# Altium PCB 主板-加霍尔.PcbDoc (part 3 of 4)
Units mm, origin at the board's own origin, x right, y up, seen from the top; angles counter-clockwise.
Board outline 97.69 x 103.45 mm, 2 copper layers (Top Layer, Bottom Layer); 80 components, 81 nets, 260 pads, 281 vias.
Unrouted connection lines stored in the file: 12.
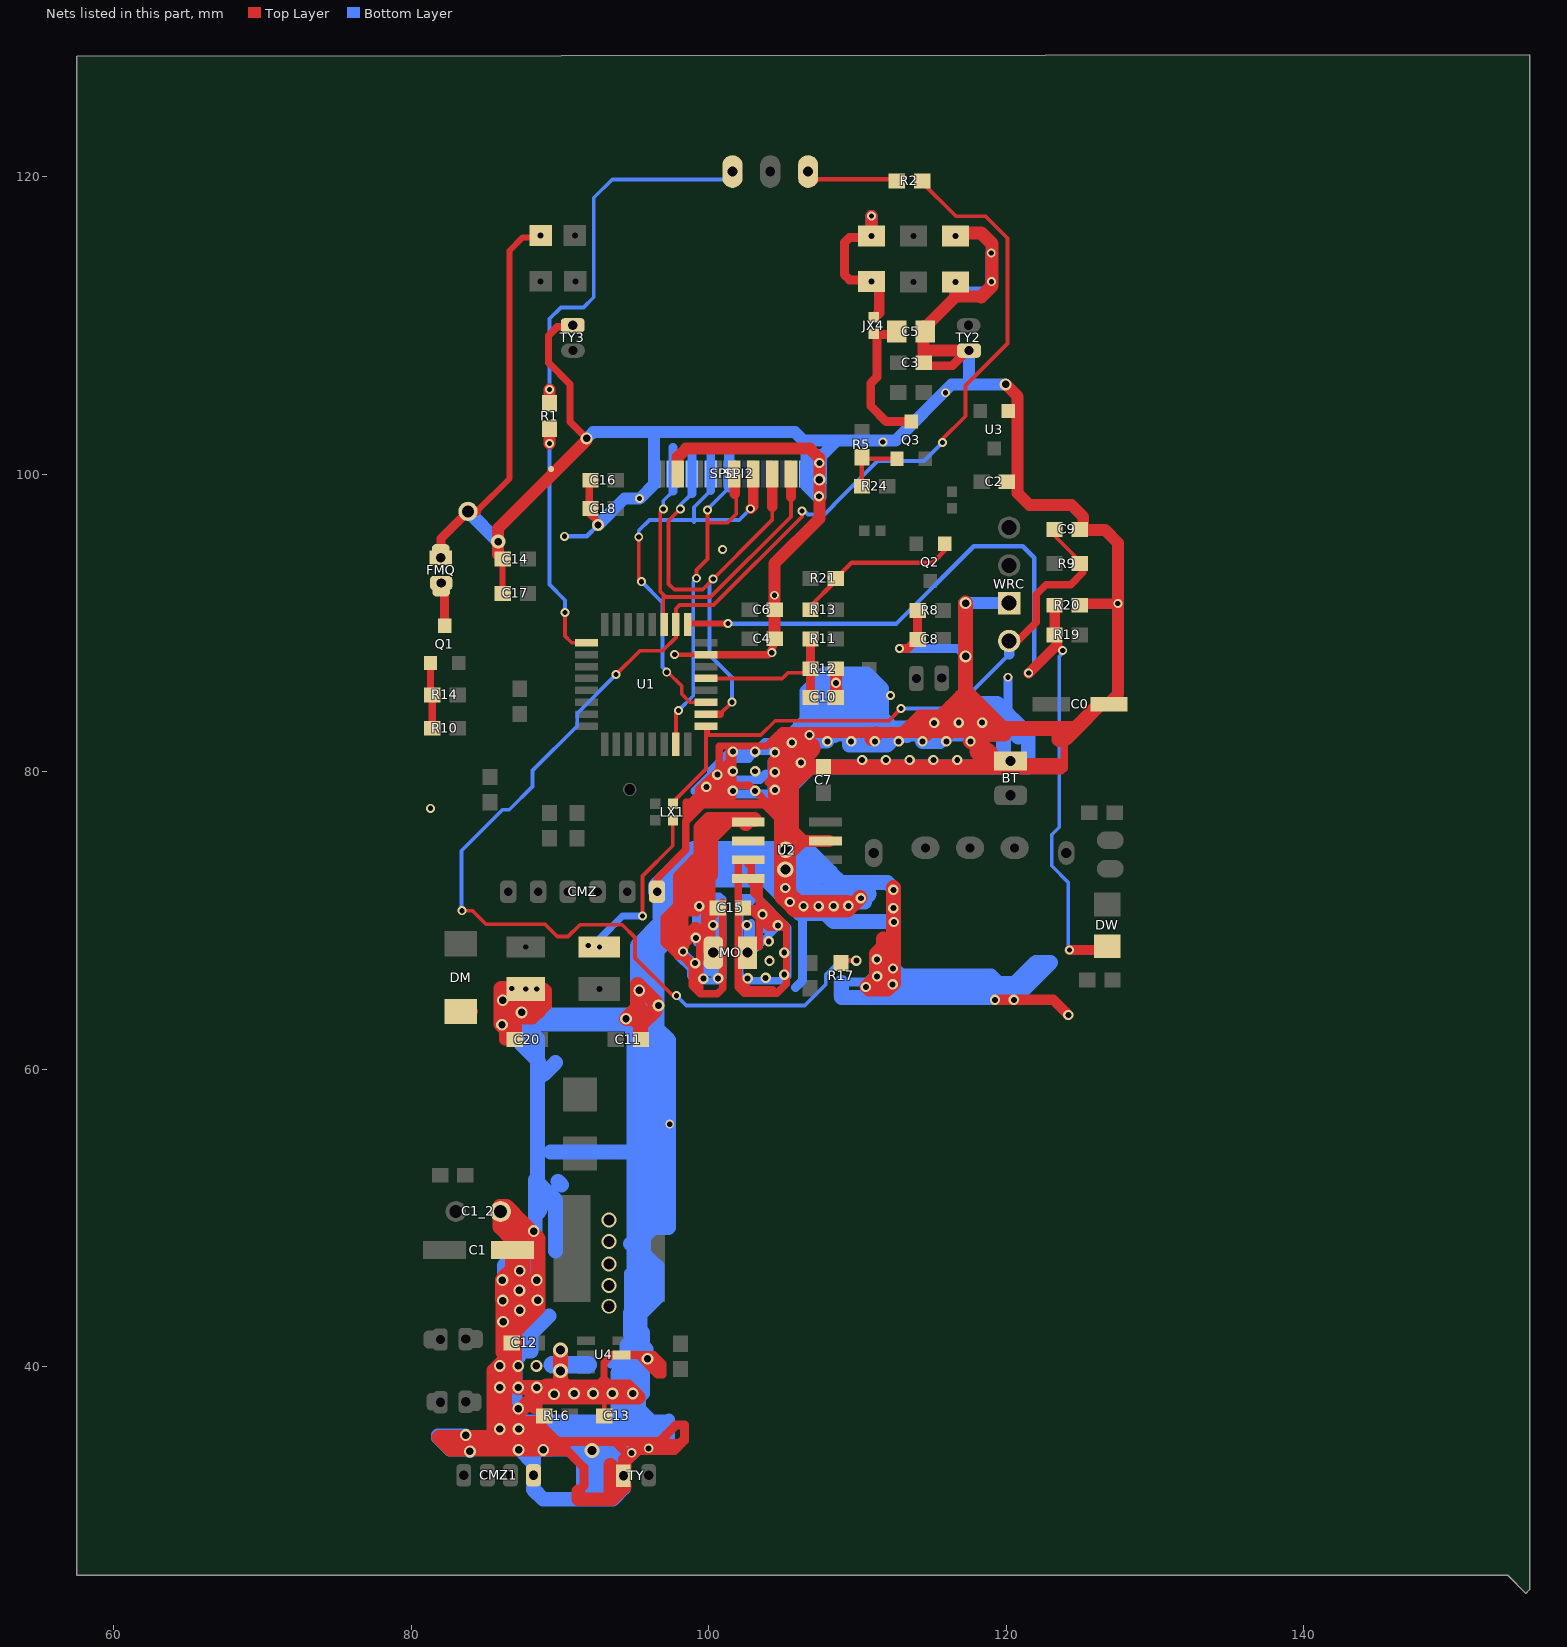
[diagram p3: the nets of this part, all layers, seen from the top]

## Via types
v1: diameter 0.6, hole 0.35, Top Layer to Bottom Layer, 105 vias
v2: diameter 0.7, hole 0.4, Top Layer to Bottom Layer, 104 vias
v3: diameter 0.8, hole 0.5, Top Layer to Bottom Layer, tented both sides, 30 vias
v4: diameter 0.8, hole 0.5, Top Layer to Bottom Layer, 15 vias
v5: diameter 1, hole 0.6, Top Layer to Bottom Layer, tented both sides, 5 vias
v6: diameter 1, hole 0.75, Top Layer to Bottom Layer, tented both sides, 5 vias
v7: diameter 3.4, hole 2.9, Top Layer to Bottom Layer, 4 vias
v8: diameter 0.65, hole 0.4, Top Layer to Bottom Layer, tented both sides, 2 vias
v9: diameter 0.8, hole 0.35, Top Layer to Bottom Layer, 2 vias
v10: diameter 0.7, hole 0.35, Top Layer to Bottom Layer, 2 vias
v11: diameter 1.1, hole 0.68, Top Layer to Bottom Layer, 2 vias
v12: diameter 0.62, hole 0.4, Top Layer to Bottom Layer, 1 vias
v13: diameter 0.95, hole 0.5, Top Layer to Bottom Layer, 1 vias
v14: diameter 0.9, hole 0.5, Top Layer to Bottom Layer, tented both sides, 1 vias
v15: diameter 0.7, hole 0.4, Top Layer to Bottom Layer, tented bottom, 1 vias
v16: diameter 0.8, hole 0.5, Top Layer to Bottom Layer, tented bottom, 1 vias

## Nets (pads, with @x,y where several pads share a name; then routed paths per layer and width w, separated by ;. In a path a pad name is that pad's centre, name@x,y a point inside that pad or via, vN(x,y) a via of type N, cw(c..) or ccw(c..) an arc to the next point about the centre after c; other vN are vias at no path point) (continued)
GND: BT.2 C0.2 C1.1 C1_2.1 C2.1 C3.1 C4.2 C5.1 C6.1 C7.1 C8.1 C9.1 C10.2 C11.2 C12.2 C13.2 C14.2 C16.1 C17.2 C18.1 C20.1 CMZ1.7 CMZ.2 DM.1 FMQ.1 pad.0@81.991,94.717 pad.0@87.7,65.4 pad.0@88.7,116.053 pad.0@89.408,100.355 pad.0@96.33,100.032 pad.0@116.6,112.932 pad.0@116.6,116.032 pad.4@83.82,97.511 R8.2 R12.1 R16.2 R20.1 SPI1.7 SPI2.8 TY2.2 TY3.2 TY.2 U1.7 U2.3 U3.1 U4.2 WRC.2 | length 1392.5
  Top Layer w0.254: C0.2@126.695,84.557 126.84,84.549 C0.2@126.913,84.546
  Top Layer w0.3: C13.2@92.989,36.8 92.989,37.854 ; v1(97.714,87.884) U1.7@99.818,87.884
  Top Layer w0.4: pad.4@84.406,97.511 86.604,99.708 86.604,115.034 87.507,115.937 pad.0@88.583,115.937 ; C17.2@86.131,91.75 C14.2@86.131,94.319
  Top Layer w0.495: U1.7@99.825,87.877 104.006,87.877 C4.2@104.523,88.724 ; C4.2@104.419,88.951 C4.2@104.65,88.951 ; C0.2@126.913,84.546 126.924,84.328 C0.2@126.924,84.633
  Top Layer w0.5: 90.221,38.811 90.221,39.227 90.51,38.938 ; TY3.2@90.855,109.919 89.826,109.919 89.23,109.323 89.23,107.518 90.678,106.07 90.678,103.53 v4(91.796,102.413) ; v4@91.992,38.412 92.005,38.424 92.227,38.647 92.368,38.647 92.371,38.65 92.964,39.243 ; C16.1@92.05,99.6 91.973,99.523 91.973,97.379 92.558,96.795 v4(92.558,96.596) ; 92.95,38.643 92.964,38.643 92.964,38.648 92.964,38.65 92.964,39.243 ; v4@93.428,37.954 93.675,38.202 94.123,38.649 93.523,38.649 ; 93.523,38.65 93.523,38.684 92.964,39.243 ; U4.2@94.539,40.767 95.25,40.767 96.545,39.472 96.901,39.472 96.901,40.208 96.305,40.804 93.496,40.804 92.964,40.272 92.964,39.243 ; CMZ.2@96.53,71.944 96.53,72.829 98.462,74.762 98.462,76.641 98.476,76.655 ; 99.113,78.285 99.125,78.272 99.162,78.236 99.456,77.942 99.496,77.902 ; 99.136,78.308 98.476,77.648 ; 99.343,78.816 99.339,78.812 99.339,78.359 ; 99.466,78.816 101.397,80.747 ; 99.949,78.435 99.822,78.308 ; v2(100.584,79.807) 100.711,79.934 100.711,81.737 103.886,81.737 104.47,82.321 ; v2@101.397,81.356 101.397,80.747 ; 104.013,79.299 104.242,79.527 ; 104.369,80.366 104.391,80.366 ; 104.572,82.423 104.496,82.347 ; 104.648,72.252 104.648,76.86 104.47,77.038 ; v2(105.588,81.966) 105.379,82.123 105.13,82.372 104.826,82.677 ; 106.248,82.779 112.981,82.779 ; 116.459,82.779 117.831,82.779 ; 118.059,82.525 116.205,82.525 ; 118.059,82.537 116.218,82.537 ; 120.498,80.061 123.723,80.061 123.901,80.239 123.901,81.813 123.546,82.169 ; 124.003,82.245 124.003,82.525 124.003,82.753 124.117,82.639 ; 124.231,82.525 124.117,82.639 ; C0.2@126.924,84.633 C0.2@126.913,84.622 ; 98.476,76.655 99.609,77.788 ; 98.476,76.655 98.476,77.241 ; 98.476,77.241 99.023,77.788 99.609,77.788 ; 98.476,77.241 98.476,77.622 ; 98.476,77.622 98.802,77.949 98.929,77.949 ; 98.476,77.622 98.476,77.648 ; 98.476,77.648 98.476,77.949 98.929,77.949 ; 98.929,77.949 99.339,78.359 ; 98.929,77.949 101.194,80.213 100.736,80.213 99.339,78.816 v2@99.67,78.816 ; 99.339,78.359 99.339,78.486 v2@99.67,78.816 ; 99.496,77.902 99.609,77.788 ; 99.496,77.902 99.416,77.902 99.822,78.308 ; 99.496,77.902 103.607,77.902 103.72,77.788 ; 99.609,77.788 103.72,77.788 ; v2@99.67,78.816 v2(99.847,78.994) 100.892,80.038 101.117,79.812 101.117,79.731 ; v2@99.67,78.816 99.67,78.308 99.822,78.308 ; v2@99.67,78.816 100.203,78.816 ; 99.822,78.308 101.575,78.308 101.629,78.363 v2(101.629,78.715) 101.629,79.096 ; 100.203,78.816 100.635,79.248 ; 100.203,78.816 100.508,78.816 100.635,78.943 ; 100.203,78.816 100,78.613 100.965,78.613 ; 100.635,78.943 100.787,79.096 101.117,79.096 ; 100.635,78.943 100.965,78.613 ; 100.635,78.943 100.635,79.248 ; 100.635,79.248 101.117,79.731 ; 100.965,78.613 101.117,78.461 101.346,78.461 101.346,79.096 ; 100.965,78.613 101.117,78.765 101.117,79.096 ; 101.117,79.096 101.117,79.731 ; 101.117,79.096 101.346,79.096 ; 101.117,79.731 v2@101.346,79.959 ; 101.346,79.096 v2@101.346,79.959 ; 101.346,79.096 101.629,79.096 ; v2@101.346,79.959 101.397,80.01 101.397,80.747 ; 101.397,80.747 101.629,80.979 v2(101.629,80.038) 101.629,79.096 ; 101.629,79.096 102.743,79.096 v2(103.124,78.715) 104.05,77.788 ; 103.72,77.788 104.242,77.267 ; 103.72,77.788 104.05,77.788 ; 104.05,77.788 104.242,77.597 ; 104.05,77.788 104.204,77.788 104.242,77.826 ; 104.242,77.267 104.242,77.597 ; 104.242,77.267 104.47,77.038 ; 104.242,77.597 104.242,77.826 ; 104.242,77.826 104.242,79.527 ; 104.242,79.527 104.242,80.518 ; 104.242,79.527 104.391,79.527 104.391,80.366 ; 104.242,80.518 104.242,80.772 104.391,80.921 ; 104.242,80.518 104.391,80.667 ; 104.391,80.366 104.47,80.366 ; 104.391,80.366 104.391,80.667 ; 104.391,80.667 104.47,80.747 ; 104.391,80.667 104.391,80.921 ; 104.391,80.921 104.391,81.632 104.47,81.712 ; 104.391,80.921 v2@104.47,81.001 ; 104.47,77.038 104.47,80.366 ; 104.47,80.366 104.572,80.366 v2@106.731,82.525 ; 104.47,80.366 104.47,80.747 ; 104.47,80.747 106.248,82.525 v2@106.731,82.525 ; 104.47,80.747 v2@104.47,81.001 ; v2@104.47,81.001 104.47,81.712 ; v2@104.47,81.001 104.496,81.026 104.496,81.28 105.994,82.779 105.537,82.779 ; 104.47,81.712 105.537,82.779 ; 104.47,81.712 104.47,82.321 ; 104.47,82.321 104.496,82.347 ; 104.496,82.347 104.826,82.677 ; 104.826,82.677 104.928,82.779 105.537,82.779 ; v2@106.731,82.525 111.239,82.525 112.727,82.525 ; v2@106.731,82.525 106.743,82.537 111.252,82.537 112.74,82.537 ; 112.727,82.525 116.027,82.525 116.205,82.525 ; 112.727,82.525 112.74,82.537 ; 112.74,82.537 114.592,82.537 116.04,82.537 116.218,82.537 ; 112.74,82.537 112.981,82.779 ; 112.981,82.779 114.15,83.947 115.875,83.947 116.279,84.351 116.838,84.351 116.894,84.351 116.261,83.718 116.205,83.718 115.646,83.718 114.884,83.718 ; 112.981,82.779 113.538,82.779 ; 113.538,82.779 113.944,82.779 ; 113.538,82.779 114.198,83.439 ; 113.944,82.779 114.884,83.718 ; 113.944,82.779 114.706,82.779 114.833,82.779 115.265,82.779 116.218,82.779 116.218,82.715 116.218,82.537 ; 114.198,83.439 114.478,83.718 ; 114.198,83.439 113.919,83.439 114.198,83.718 114.478,83.718 ; 114.198,83.439 114.351,83.439 114.63,83.718 ; 114.478,83.718 114.63,83.871 114.783,83.871 114.63,83.718 ; 114.478,83.718 114.63,83.718 ; 114.63,83.718 114.884,83.718 ; 116.205,82.525 116.218,82.537 ; 123.685,80.48 123.485,80.68 120.853,80.68 121.218,80.315 123.52,80.315 123.685,80.48 ; 123.685,80.48 123.698,80.467 123.698,80.493 123.685,80.48 ; 124.117,82.639 124.384,82.906 126.024,84.546 126.303,84.546 C0.2@126.837,84.546 ; C0.2@126.837,84.546 126.84,84.549 C0.2@126.913,84.622 ; C0.2@126.837,84.546 C0.2@126.913,84.546 C0.2@126.913,84.622
  Top Layer w0.6: FMQ.1@81.991,94.398 81.991,95.682 pad.4@83.82,97.511 pad.4@84.406,97.511 ; 86.076,36.198 86.076,37.036 86.081,37.032 86.276,36.836 86.689,36.423 ; 86.69,36.423 87.148,36.423 87.546,36.423 87.774,36.195 89.15,34.819 ; v3@86.982,36.055 v3@87.516,36.055 ; 87.376,36.195 v3@87.516,36.055 ; 88.033,35.369 87.566,35.369 ; pad.0@88.583,115.937 pad.0@88.7,116.053 ; R16.2@88.67,36.957 88.67,36.195 88.67,35.841 89.764,34.747 ; 88.951,35.865 89.764,35.052 89.764,34.747 ; 89.852,35.052 90.037,34.868 ; 91.237,31.623 91.618,32.004 91.618,33.223 90.551,34.29 89.484,34.29 89.306,34.468 89.205,34.569 89.103,34.671 89.172,34.796 ; 94.259,34.417 93.696,34.98 ; v8(95.961,34.519) 96.114,34.366 97.688,34.366 98.374,35.052 98.374,36.093 97.815,36.093 96.787,35.065 97.003,34.849 ; 96.698,34.544 96.749,34.595 97.003,34.849 ; 96.723,34.849 97.003,34.849 ; 97.134,34.98 93.696,34.98 ; 98.171,34.849 98.171,34.976 ; 98.374,35.179 98.171,34.976 ; v1(112.827,88.29) 113.386,88.29 114.05,88.955 R8.2@114.05,90.881 ; C3.1@114.45,107.3 116.382,107.3 117.413,108.331 TY2.2@117.501,108.419 ; 87.49,35.446 87.427,35.509 87.109,35.827 v3@87.49,35.827 ; 87.49,35.446 87.49,35.573 v3@87.49,35.827 ; 87.49,35.446 87.566,35.369 ; 87.49,35.446 87.49,35.369 87.566,35.369 ; v3@87.49,35.827 87.744,35.827 ; v3@87.516,36.055 87.744,35.827 ; 87.566,35.369 88.117,34.819 ; 87.744,35.827 87.933,35.827 88.117,35.642 88.117,34.819 ; 88.117,34.819 89.15,34.819 ; 89.15,34.819 89.172,34.796 ; 89.15,34.819 89.184,34.819 89.172,34.796 ; 89.172,34.796 89.298,34.671 89.399,34.569 89.475,34.493 89.764,34.493 89.764,34.595 89.764,34.671 89.764,34.747 ; 89.764,34.747 89.84,34.671 ; 89.84,34.671 90.149,34.362 90.149,34.755 ; 89.84,34.671 90.037,34.868 ; 90.037,34.868 90.149,34.755 ; 90.037,34.868 90.149,34.98 90.149,34.755 ; 90.149,34.755 90.424,34.48 90.424,34.722 90.165,34.98 93.696,34.98 ; 97.003,34.849 98.044,34.849 98.171,34.976
  Top Layer w0.7: DM.1@83.34,63.885 DM.1@84.125,63.885 ; v2(119.253,64.668) v2(120.523,64.668) 123.165,64.668 v2(124.181,63.652) ; R20.1@125.15,91.308 v1@127.432,91.308
  Top Layer w0.8: C14.2@86.131,94.319 85.847,94.603 85.847,96.363 v4@91.796,102.311 ; 86.311,62 v3@86.311,62.763 ; 86.766,63.017 86.766,63.419 87.015,63.419 ; C20.1@86.958,62 86.766,62.191 87.015,62.44 87.015,63.419 ; v3(87.427,63.83) v3@87.524,63.83 ; pad.0@87.6,65.406 87.602,65.406 87.617,65.406 87.617,65.415 87.617,65.431 pad.0@87.617,65.457 ; 87.681,38.608 87.716,38.643 88.91,38.643 89.078,38.811 89.924,38.811 89.762,38.649 89.756,38.644 ; 88.316,37.854 92.989,37.854 ; 88.348,37.954 89.037,38.644 89.756,38.644 ; v10(88.443,65.405) 88.958,65.405 89.06,65.303 89.06,64.305 88.585,63.83 ; pad.0@88.519,65.1 88.519,64.825 v3@87.524,63.83 ; 88.621,63.83 88.585,63.83 ; 89.306,38.643 89.611,38.643 89.756,38.644 ; 90.957,38.659 90.957,38.649 90.957,38.647 90.957,38.645 89.764,38.644 89.756,38.644 ; 92.227,38.647 92.368,38.647 92.533,38.648 92.674,38.648 92.964,38.648 92.989,38.648 93.076,38.648 93.522,38.649 ; v4(94.894,38.202) 94.894,38.32 94.894,38.329 95.269,37.954 95.261,37.954 ; SPI1.7@97.917,100.032 97.917,101.16 98.484,101.727 106.807,101.727 107.442,101.092 v2(107.442,100.762) v4(107.442,99.644) 107.442,97.028 104.419,94.005 C4.2@104.419,88.951 ; 105.156,71.704 105.156,71.933 v2(105.156,72.187) v11@105.156,73.33 ; 105.156,76.86 v11@105.156,73.575 ; v11@105.181,72.923 105.181,73.304 v11@105.156,73.33 ; 105.588,76.124 106.35,75.362 105.318,74.33 105.318,73.575 v11@105.156,73.575 ; 106.07,75.362 U2.3@108.077,75.362 ; C10.2@108.55,85 R12.1@108.55,86.932 ; C3.1@114.45,107.5 C5.1@114.45,109.976 ; C5.1@114.45,109.776 116.6,111.926 pad.0@116.6,112.932 ; 114.816,108.331 117.413,108.331 TY2.2@117.475,108.331 ; 116.756,111.946 118.321,111.946 ; v4(119.964,106.045) 120.766,105.243 120.766,98.74 121.564,97.942 124.384,97.942 125.184,97.142 125.184,96.266 126.644,96.266 127.533,95.377 127.533,85.242 C0.2@126.924,84.633 ; 87.015,63.419 88.174,63.419 88.585,63.83 ; v3@87.524,63.83 88.585,63.83 ; v11@105.156,73.33 105.14,73.429 105.131,73.483 105.115,73.575 105.131,73.575 v11@105.156,73.575 ; v11@105.156,73.33 v11(105.156,73.431) v11@105.156,73.575 ; 118.165,111.946 ccw(c118.165,112.467) 118.533,112.099 ; 118.165,111.946 ccw(c118.165,112.467) 118.533,112.099 ; 118.165,111.946 ccw(c118.165,112.467) 118.533,112.099
  Top Layer w0.9: 91.237,31.623 91.237,31.09 93.523,31.09 TY.2@94.364,31.931 ; TY.2@94.123,32.674 93.37,33.426 93.37,31.242 93.472,31.14 TY.2@94.364,32.032 ; TY.2@94.364,32.674 94.364,33.658 ; v8(95.961,34.519) 95.225,34.519 ; 96.749,34.595 95.301,34.595 95.225,34.519 ; pad.0@116.865,116.23 118.313,116.23 119.05,115.494 119.05,112.674 118.321,111.946 ; 94.364,33.658 94.364,33.76 ; 94.364,33.658 94.361,33.655 94.361,33.757 94.364,33.76 ; 94.364,33.658 v8@94.818,34.112 ; 94.364,33.76 v8(94.818,34.214) ; v8@94.818,34.112 95.225,34.519 ; v8@94.818,34.112 v8(94.818,34.214) ; v8(94.818,34.214) 95.123,34.519 95.225,34.519
  Top Layer w1: 85.649,39.751 v3(85.954,40.056) ; 85.877,37.694 85.877,35.916 85.573,35.611 ; 86.081,37.49 86.081,37.032 86.081,35.966 85.573,35.458 ; v3(86.131,45.822) 86.157,42.977 86.157,40.996 ; v3@86.157,42.697 v3@86.411,42.951 ; v3@86.208,43.282 86.208,45.974 86.8,46.566 C1.1@86.8,47.84 C1.1@86.8,48.26 ; C12.2@86.276,41.437 86.276,37.778 ; 86.284,40.97 v3@86.284,43.078 ; C12.2@86.309,41.529 86.309,40.03 86.88,39.505 86.944,39.446 86.944,38.799 87.136,38.608 v3(87.198,38.608) 87.681,38.608 v3(88.443,38.608) 88.875,38.608 ; v3@86.311,62.763 86.03,63.044 86.03,65.43 v10(86.766,65.43) ; 86.36,35.992 86.397,36.029 ; 86.385,44.958 v3@87.374,43.97 ; 86.411,49.657 87.342,48.726 ; 86.431,63.754 86.766,63.419 86.766,65.406 87.6,65.406 pad.0@87.6,65.432 ; 86.614,44.45 86.614,45.339 ; 86.689,36.423 86.919,36.652 ; 86.766,63.017 86.958,62.826 C20.1@86.958,62 ; 86.8,48.557 85.95,49.407 85.95,50.775 86.411,50.775 87.503,49.682 ; 86.868,41.046 85.573,39.751 85.573,38.481 ; 86.944,39.497 86.944,43.663 86.294,44.313 87.237,44.313 ; v3@86.982,36.055 86.276,36.762 86.276,36.836 86.276,37.295 ; v3(87.427,63.83) pad.0@87.427,65.329 ; pad.0@87.612,65.41 87.617,65.406 87.661,65.361 pad.0@87.72,65.302 ; 87.744,35.827 87.49,35.573 87.427,35.509 87.165,35.247 85.581,35.247 ; v3@88.036,48.889 88.036,48.641 C1.1@87.503,48.108 ; v3@88.062,45.745 87.68,45.364 87.68,45.229 ; 88.316,37.311 88.316,37.854 ; 88.67,36.195 87.774,36.195 87.376,36.195 87.148,36.423 86.919,36.652 ; 88.91,38.643 88.875,38.608 ; 89,38.649 89.611,38.649 89.762,38.649 89.764,38.649 90.957,38.649 92.227,38.65 92.371,38.65 92.535,38.65 ; v3@89.103,34.671 89.298,34.671 89.764,34.671 89.84,34.671 89.764,34.595 89.738,34.569 89.399,34.569 v3@89.205,34.569 ; 89.306,34.468 85.581,34.468 ; 89.764,38.647 90.957,38.647 ; 90.043,39.1 v5(90.043,39.729) v5(90.043,41.123) ; v4@91.992,38.412 91.757,38.647 90.957,38.647 ; 92.989,38.71 92.989,38.65 ; C11.2@95.428,62.222 95.428,62.967 95.225,63.17 ; 95.431,64.033 95.225,64.033 ; v16(95.885,40.538) 96.444,39.98 96.444,40.081 v16@95.961,40.564 ; v3@96.393,64.165 96.393,63.957 ; 105.588,76.124 105.588,79.121 106.782,80.315 BT.2@121.218,80.315 ; v2@109.271,70.968 109.601,70.968 v2@110.185,71.552 ; v2@110.634,65.549 111.269,66.184 111.269,67.759 ; v2@110.803,65.38 111.989,65.38 v2@112.42,65.811 ; v2@110.96,82.245 111.239,82.525 111.252,82.537 ; 110.973,65.811 v2@112.116,65.811 ; 111.176,65.38 111.506,65.71 v2(112.37,65.71) ; 111.633,67.869 111.379,67.869 112.42,68.91 ; 111.735,66.167 111.735,66.192 ; 111.735,68.758 111.735,66.531 ; v2@112.166,65.761 v2@112.116,65.811 ; v2@112.344,66.531 111.735,66.531 ; v2@112.42,72.212 v2(112.42,72.06) v2(112.42,70.841) v2@112.42,65.811 ; 114.592,82.537 114.833,82.779 ; 114.706,82.779 115.646,83.718 116.279,84.351 116.98,85.052 117.17,84.861 117.17,84.684 ; 115.265,82.779 116.205,83.718 116.838,84.351 117.17,84.684 ; 116.027,82.525 116.04,82.537 116.218,82.715 v2(116.815,83.312) ; v4(117.272,91.338) 117.272,85.42 119.786,82.906 123.546,82.906 ; v2(117.602,82.042) 118.059,82.499 ; 118.681,82.537 119.875,82.537 ; 123.546,82.169 123.546,82.906 ; 124.003,82.245 124.663,82.906 ; 124.003,82.525 124.231,82.525 ; C0.2@126.303,84.546 124.663,82.906 ; 85.479,34.468 82.652,34.468 81.864,35.255 85.217,35.255 85.573,35.611 ; 85.479,34.468 85.479,35.247 85.547,35.247 ; 85.479,34.468 85.547,34.468 ; 85.547,34.468 85.581,34.468 ; 85.547,34.468 85.547,35.247 ; 85.547,35.247 85.573,35.273 85.573,35.408 ; 85.547,35.247 85.581,35.247 ; 85.547,35.247 85.547,35.433 ; 85.547,35.433 85.573,35.408 ; 85.547,35.433 85.573,35.458 ; 85.573,35.408 85.581,35.4 85.581,35.247 ; 85.573,35.408 85.573,35.458 ; 85.573,35.458 85.573,35.611 ; 85.573,35.611 85.573,38.481 ; 85.573,38.481 86.276,37.778 ; 85.581,34.468 85.581,35.247 ; 86.276,37.295 86.276,37.778 ; 86.276,37.295 86.919,36.652 ; 86.919,36.652 88.875,38.608 ; 87.237,44.313 87.493,44.313 87.503,44.323 ; 87.237,44.313 87.237,42.66 88.536,43.959 v3@88.536,44.374 ; 87.237,44.313 v3@87.237,44.946 ; v3@87.237,44.946 v3@87.503,45.212 ; v3@87.237,44.946 87.02,44.729 87.02,47.625 C1.1@87.494,48.099 ; C1.1@87.494,48.099 C1.1@87.503,48.09 ; C1.1@87.494,48.099 C1.1@87.503,48.108 ; 87.503,44.323 v3@87.503,45.212 ; 87.503,44.323 87.68,44.5 87.68,45.212 ; v3@87.503,45.212 87.68,45.212 ; v3@87.503,45.212 v3@87.6,45.309 ; C1.1@87.503,48.09 87.503,45.406 v3@87.6,45.309 ; C1.1@87.503,48.09 C1.1@87.503,48.108 ; C1.1@87.503,48.108 87.503,49.682 ; 87.503,49.682 88.036,49.149 88.036,49.124 88.536,48.624 88.536,45.034 ; pad.0@87.6,65.432 87.617,65.431 87.701,65.43 87.845,65.427 pad.0@87.723,65.305 ; pad.0@87.6,65.432 87.617,65.415 87.665,65.366 pad.0@87.723,65.305 ; pad.0@87.6,65.432 87.602,65.406 87.603,65.393 87.606,65.345 87.617,65.199 pad.0@87.72,65.302 ; v3@87.6,45.309 87.68,45.229 ; 87.68,45.212 87.697,45.212 ; 87.68,45.212 87.68,45.229 ; 87.68,45.229 87.697,45.212 ; 87.697,45.212 v3@88.536,44.374 ; 87.697,45.212 88.358,45.212 88.536,45.034 ; pad.0@87.72,65.302 87.96,65.062 pad.0@87.723,65.305 ; pad.0@87.72,65.302 pad.0@87.723,65.305 ; v3@88.536,44.374 88.536,45.034 ; 90.957,38.647 91.406,38.647 ; 90.957,38.647 91.406,38.647 ; 91.406,38.647 92.227,38.647 ; 91.406,38.647 92.227,38.647 ; 92.227,38.647 92.532,38.647 92.535,38.65 ; 92.535,38.65 92.676,38.65 ; 92.535,38.65 92.676,38.65 ; 92.676,38.65 92.964,38.65 ; 92.676,38.65 92.674,38.648 v4(92.227,38.202) 92.475,37.954 92.989,37.954 ; 92.676,38.65 92.964,38.65 ; 92.964,38.65 92.989,38.65 ; 92.964,38.65 92.989,38.65 ; 92.989,37.954 92.989,38.648 92.989,38.65 ; 92.989,37.954 93.428,37.954 95.261,37.954 94.894,38.32 94.564,38.65 ; 92.989,38.65 93.074,38.65 ; 92.989,38.65 93.523,38.65 ; 93.074,38.65 93.076,38.648 v4(93.523,38.202) 93.675,38.202 v4(94.894,38.202) 94.446,38.65 ; 93.074,38.65 93.523,38.65 ; 93.523,38.65 94.124,38.65 ; 93.523,38.65 94.124,38.65 ; 94.124,38.65 94.362,38.65 ; 94.124,38.65 94.362,38.65 ; 94.362,38.65 94.446,38.65 ; 94.362,38.65 94.564,38.65 ; 94.446,38.65 94.564,38.65 ; 95.225,63.17 94.996,63.398 94.463,63.398 95.098,64.033 95.225,64.033 ; 95.225,63.17 95.225,64.033 ; 95.225,63.17 95.606,63.17 96.393,63.957 ; 95.225,64.033 95.225,65.71 96.393,64.541 96.393,63.957 ; 105.308,79.198 ccw(c105.308,80.058) 105.917,79.45 ; 105.308,79.198 ccw(c105.308,80.058) 105.917,79.45 ; 105.308,79.198 ccw(c105.308,80.058) 105.917,79.45 ; 105.321,79.2 ccw(c105.061,80.171) 105.932,79.668 ; 105.321,79.2 ccw(c105.061,80.171) 105.932,79.668 ; 105.321,79.2 ccw(c105.061,80.171) 105.932,79.668 ; 105.321,79.2 ccw(c105.061,80.171) 105.932,79.668 ; 105.321,79.2 ccw(c105.061,80.171) 105.932,79.668 ; 105.321,79.2 ccw(c105.061,80.171) 105.932,79.668 ; 105.344,79.283 cw(c104.755,78.694) 105.588,78.694 ; 105.344,79.283 cw(c104.755,78.694) 105.588,78.694 ; 105.344,79.283 cw(c104.755,78.694) 105.588,78.694 ; 111.735,66.192 v2@112.116,65.811 ; 111.735,66.192 111.735,66.531 ; v2@112.116,65.811 v2@112.42,65.811 ; 117.17,83.795 117.17,82.829 118.643,82.829 118.643,83.223 118.529,83.337 117.78,83.337 117.78,84.404 117.17,83.795 ; 117.17,83.795 117.17,84.684 ; 123.546,82.906 124.384,82.906 124.663,82.906
  Top Layer w1.5: 105.156,71.704 105.893,70.968 v2(106.375,70.968) v2(107.391,70.968) v2(108.407,70.968) v2@109.271,70.968 ; v2@105.156,71.933 105.131,71.958 105.131,73.483 105.131,73.575 105.131,79.959 106.782,81.61 ; 118.285,81.407 118.407,81.407 118.75,81.153
  Bottom Layer w0.3: v1(90.297,95.834) 91.796,95.834 v4(92.558,96.596)
  Bottom Layer w0.4: SPI2.8@106.375,100.223 106.375,102.273
  Bottom Layer w0.6: 94.615,41.395 94.615,46.304 ; 99.085,78.715 99.365,78.994 ; 99.411,78.715 99.614,78.511 100.203,78.511 ; v2(99.847,78.994) v2@99.72,78.994 ; 103.835,79.858 103.447,79.469 100.922,79.469 v2(100.584,79.807) 100.584,80.14 101.215,80.772 101.215,80.899 102.667,80.899 v2(103.124,81.356) 103.193,81.425 104.234,81.425 104.445,81.636 104.115,81.966 103.782,81.966 103.33,81.513 101.63,81.513 100.18,80.063 100.18,79.809 99.365,78.994 ; 105.232,78.511 100.203,78.511 ; 105.842,65.507 106.319,65.984 106.319,70.485 106.319,70.912 v2(106.375,70.968) ; 108.864,64.745 108.864,65.837 ; 109.347,65.862 110.642,65.862 111.1,66.319 v2@111.1,67.335 ; v1(112.827,88.29) 116.738,88.29 v4(117.272,87.757) ; 117.907,83.287 117.717,83.476 117.717,84.162 118.008,83.871 120.117,83.871 ; v1(120.117,86.36) 120.117,83.871 ; 120.244,83.312 120.117,83.439 120.117,83.871 ; 99.365,78.994 v2@99.72,78.994 ; v2@99.72,78.994 100.203,78.511
  Bottom Layer w0.8: 86.055,39 86.552,39 86.614,38.938 ; 86.081,65.303 86.131,65.354 pad.0@87.621,65.354 ; 86.203,63.936 87.071,63.068 ; 86.614,63.833 87.602,63.833 v3@87.617,63.817 ; 87.6,62.944 90.38,62.944 cw(c90.38,65.29) 88.511,63.87 ; pad.0@88.287,65.194 88.049,65.432 87.6,65.432 89.278,63.754 95.326,63.754 ; 88.889,64.143 cw(c88.521,63.774) 89.041,63.752 ; 89.484,63.5 89.84,63.144 ; v4(91.796,102.413) 92.227,102.845 96.33,102.845 ; v4(92.558,96.596) 94.336,98.374 v1(95.352,98.374) 96.33,99.353 pad.0@96.33,100.032 96.33,102.845 ; 94.488,34.519 94.818,34.519 95.214,34.519 v8(95.961,34.519) 96.952,34.519 97.18,34.747 97.333,34.9 97.333,36.449 97.18,36.297 ; 94.64,42.164 94.64,43.637 ; 95.555,63.805 96.418,63.805 ; 95.656,66.345 95.656,66.712 ; v4@107.417,99.593 v2@107.417,100.533 ; v2@107.442,101.092 108.623,102.273 106.375,102.273 ; 107.442,101.321 106.832,101.321 106.832,101.816 106.375,102.273 ; v2@108.153,71.145 108.179,71.12 v2@108.382,70.917 ; 108.648,102.273 112.56,102.273 116.332,106.045 v4(119.964,106.045) ; pad.0@116.6,112.932 116.6,111.924 116.919,112.243 118.593,112.243 118.999,112.649 v1(118.999,114.884) ; v4@117.17,91.345 WRC.2@120.2,91.345 ; 117.501,106.045 TY2.2@117.501,108.319 ; 95.152,63.805 ccw(c95.152,64.476) 95.656,64.033 ; 95.152,63.805 ccw(c95.152,64.476) 95.656,64.033 ; 95.152,63.805 ccw(c95.152,64.476) 95.656,64.033 ; 96.33,102.845 105.804,102.845 106.375,102.273
  Bottom Layer w0.9: 82.423,35.204 82.423,34.595 ; pad.4@83.82,97.511 v13(85.852,95.479) ; v3(83.947,34.315) v3@83.845,34.417 ; 86.652,36.386 87.046,36.779 87.046,39.656 ; 92.903,31.09 92.954,31.14 93.505,31.691 ; 93.484,40.322 93.841,40.322 ; 93.841,39.599 93.841,37.009 94.742,36.108 ; 94.092,36.108 94.714,35.486 96.314,35.486 96.441,35.486 97.18,34.747 95.442,34.747 ; 94.264,31.831 94.264,32.182 94.264,32.207 TY.2@94.264,32.674 94.264,33.569 95.214,34.519 95.442,34.747 ; 95.112,35.077 95.239,34.95 ; 95.174,34.849 95.148,34.849 94.488,34.849 94.59,34.95 95.239,34.95 ; 81.788,35.408 v3(83.664,35.408) ; 81.788,35.408 82.334,35.408 82.334,34.684 ; 81.788,35.408 81.788,35.23 82.334,34.684 ; 82.334,34.684 82.423,34.595 ; 82.423,34.595 82.601,34.417 83.483,34.417 ; 83.483,34.417 v3@83.845,34.417 ; 83.483,34.417 83.664,34.598 ; 83.664,34.598 v3@83.694,34.568 ; 83.664,34.598 v3@83.694,34.568 ; v3(83.664,35.408) 82.347,35.408 83.156,34.598 83.664,35.106 v3(83.664,35.408) ; v3(83.664,35.408) 83.694,35.378 v3@83.694,34.568 ; v3@83.694,34.568 v3@83.845,34.417 ; 95.239,34.95 95.244,34.945 95.442,34.747
  Bottom Layer w1: v3@86.055,40.005 86.055,39 86.055,36.297 ; 86.081,65.303 86.081,63.017 88.57,60.528 88.57,60.427 ; 86.157,63.754 v3@86.157,64.523 ; v3@86.258,42.933 86.258,46.812 86.665,47.219 ; 86.385,42.672 86.385,42.52 v3@87.354,43.488 ; 86.411,40.259 v3@86.411,44.221 ; 86.487,42.723 86.643,42.879 ; pad.0@86.521,65.432 87.6,65.432 v10(86.766,65.43) pad.0@86.664,65.429 ; 86.589,43.637 87.401,44.45 ; 86.614,36.386 86.614,38.938 86.614,39.167 86.843,38.938 ; 86.792,43.314 86.792,43.466 ; 86.868,47.498 87.884,48.514 87.884,44.558 86.792,43.466 ; 86.919,35.458 93.472,35.458 93.294,35.636 93.426,35.636 92.954,36.108 ; 87.02,41.275 87.859,41.275 ; 87.147,42.792 87.916,43.561 ; 87.224,40.665 86.868,41.021 86.893,41.046 ; v3@87.396,44.071 86.792,43.466 ; 87.579,62.964 88.494,62.05 88.494,51.41 cw(c87.943,50.859) 88.549,50.37 ; v3@88.697,34.595 v3@88.773,34.519 ; v3@88.824,34.519 v3@88.773,34.519 ; v3@88.874,34.468 v3@88.926,34.468 ; 88.9,59.639 89.713,60.452 ; v3@89.002,34.544 v3@88.926,34.468 ; 89.129,34.9 88.697,34.9 ; 89.256,43.409 88.062,42.215 ; 89.332,34.468 v3@89.129,34.468 ; 89.357,54.432 96.728,54.432 ; 89.672,36.108 92.954,36.108 ; 89.704,47.777 89.704,51.215 88.341,52.578 88.341,43.536 88.062,43.256 ; 89.865,52.476 90.117,52.225 ; 91.694,33.376 91.981,33.376 ; 91.999,32.029 92.151,32.182 92.522,32.182 ; 92.001,32.125 91.663,31.787 ; 92.954,31.14 93.574,31.14 94.264,31.831 93.523,31.09 88.875,31.09 88.22,31.744 CMZ1.7@88.22,32.7 88.22,33.522 ; 93.223,32.7 92.804,32.7 93.323,32.182 ; 93.505,31.691 93.601,31.787 ; 93.604,32.085 93.604,32.182 ; 93.955,35.636 93.955,34.976 93.98,34.95 94.386,34.95 94.488,34.849 ; TY.2@94.264,32.182 TY.2@94.239,32.182 ; TY.2@94.264,32.207 TY.2@94.239,32.182 ; 94.488,35.707 94.488,34.849 ; 94.615,37.186 94.656,37.144 ; 94.656,36.432 94.656,37.144 ; 94.742,36.108 94.092,36.108 ; 94.755,48.273 95.326,48.844 ; 94.793,42.164 95.555,41.402 ; 94.92,41.758 94.92,39.345 95.225,39.649 ; 94.971,48.844 95.326,48.844 ; 94.971,62.407 94.971,54.576 ; 95.098,49.835 95.758,50.495 ; 95.148,44.653 95.225,44.729 ; 95.148,46.228 95.148,46.076 ; 95.225,37.391 95.225,39.649 ; 95.225,44.12 95.225,44.729 ; 95.244,34.945 95.148,34.849 94.818,34.519 94.488,34.188 ; 95.326,48.057 95.326,48.844 ; 95.326,50.927 95.326,51.155 ; 95.326,62.763 95.326,54.576 94.971,54.576 ; 95.327,61.713 cw(c97.266,61.713) 95.895,63.084 ; 95.327,62.763 96.52,62.763 ; 95.542,48.628 95.898,48.984 ; 95.631,47.498 95.631,48.412 ; 95.682,47.523 96.469,46.736 ; 95.733,48.819 95.898,48.984 ; 95.758,45.339 95.758,47.32 ; 95.824,63.084 cw(c94.758,62.017) 96.266,62.017 ; 95.838,63.074 cw(c95.5,62.386) 96.266,62.386 ; 95.858,63.069 cw(c95.831,62.381) 96.52,62.381 ; 95.898,44.552 95.898,45.402 95.225,44.729 ; 95.898,49.416 95.898,48.984 ; 95.904,63.142 ccw(c96.52,63.454) 96.52,62.763 ; 95.961,49.708 96.19,49.708 ; 96.284,35.456 96.314,35.486 94.656,37.144 ; 96.441,35.486 96.7,35.486 97.231,36.017 ; 96.52,46.761 96.52,44.653 95.377,43.51 95.377,42.469 95.555,42.291 95.555,41.402 ; 96.52,68.123 96.52,62.763 ; CMZ.2@96.53,71.944 97.866,71.944 ; 96.977,49.708 96.622,49.708 95.898,48.984 ; 97.18,36.297 96.139,36.297 95.301,37.135 95.301,37.973 95.54,38.212 95.54,39.882 95.555,39.896 95.555,39.98 ; 103.745,72.836 106.096,70.485 106.319,70.485 107.823,70.485 108.382,69.926 112.42,69.926 v2(112.42,70.841) 112.42,72.161 112.014,72.568 108.864,72.568 108.179,73.254 ; v11(105.181,74.752) 106.705,74.752 108.179,73.279 108.179,73.254 ; 106.136,72.507 106.451,72.822 106.959,73.33 ; SPI2.8@106.649,100.666 106.649,99.294 v2(107.417,98.527) ; v2@106.782,82.524 v2@106.87,82.436 ; v2@107.417,98.501 v2(107.417,98.527) ; v4@107.417,99.593 v2(107.417,98.527) ; v4@107.442,99.492 v4(107.442,99.644) v2(107.442,100.762) v2@107.442,101.092 ; v2@108.179,70.915 v2@108.179,70.917 ; 108.179,71.806 108.179,72.517 ; 108.471,82.436 107.975,82.436 ; 108.941,65.837 108.941,64.821 113.005,64.821 ; 109.195,71.501 108.636,72.06 108.179,72.517 ; v2@109.449,71.247 110.49,71.247 v2(110.236,71.501) ; 109.466,86.335 109.466,82.525 ; 109.728,86.233 110.363,85.598 110.363,82.781 110.583,82.561 ; 111.049,85.649 111.049,83.026 110.583,82.561 ; v2(111.303,67.386) 111.303,67.031 111.912,66.421 ; 111.811,67.361 v2(112.395,66.777) 112.903,66.269 ; 112.039,66.421 111.912,66.421 ; v2@112.166,66.523 112.42,66.269 ; v2@112.395,65.938 111.912,66.421 ; 112.598,65.227 113.005,64.821 ; 113.342,82.448 113.342,82.525 ; v2(114.375,82.042) 115.545,82.042 116.027,82.525 ; BT.2@120.297,80.674 BT.2@120.297,80.315 ; 120.371,65.507 120.802,65.938 ; 120.828,82.321 119.99,83.16 119.99,83.287 ; 120.853,65.735 119.939,64.821 ; 86.055,36.297 92.765,36.297 92.954,36.108 ; 86.055,36.297 86.055,35.687 86.754,34.989 ; 86.055,36.297 86.754,35.598 ; 86.754,34.989 v3@87.224,34.519 ; 86.754,34.989 86.754,35.598 ; 86.754,35.598 87.452,34.9 ; 86.893,41.046 88.062,41.046 88.062,42.215 ; 86.893,41.046 86.893,42.088 88.062,43.256 ; v3@87.224,34.519 88.22,33.522 ; v3@87.224,34.519 87.833,34.519 ; 87.452,34.9 87.833,34.519 ; 87.452,34.9 88.697,34.9 ; 87.833,34.519 88.316,34.519 ; 88.062,42.215 88.062,43.256 ; 88.22,33.522 88.22,34.423 88.316,34.519 ; 88.316,34.519 v3@88.773,34.519 ; 88.697,34.9 v3@89.128,34.468 ; v3@88.773,34.519 v3(88.875,34.417) v3@88.926,34.468 ; v3@88.926,34.468 v3@89.128,34.468 ; v3@89.128,34.468 91.109,34.468 ; 91.109,34.468 94.107,34.468 94.488,34.849 ; 91.109,34.468 91.948,33.629 91.567,33.248 91.567,31.691 ; 91.567,31.691 92.403,31.691 92.499,31.787 ; 91.567,31.691 91.663,31.787 ; 91.663,31.787 92.499,31.787 ; 91.981,33.376 92.522,33.376 ; 91.981,33.376 92.522,32.835 ; 92.499,31.787 93.601,31.787 ; 92.499,31.787 92.522,31.81 92.522,32.182 ; 92.522,32.182 93.323,32.182 ; 92.522,32.182 92.522,32.835 ; 92.522,32.835 92.522,33.376 ; 92.522,32.835 93.063,33.376 ; 92.522,33.376 93.063,33.376 ; 92.522,33.376 92.522,33.64 91.948,34.214 93.853,34.214 94.183,33.884 ; 92.954,36.108 93.523,36.678 94.092,36.108 ; 92.954,36.108 94.092,36.108 ; 93.063,33.376 93.604,33.376 ; 93.323,32.182 93.659,31.845 93.601,31.787 ; 93.323,32.182 93.604,32.182 ; 93.601,31.787 93.844,31.787 TY.2@94.239,32.182 ; 93.604,32.182 93.604,33.376 ; 93.604,32.182 TY.2@94.239,32.182 ; 93.604,33.376 93.675,33.376 94.183,33.884 ; 94.183,33.884 94.488,34.188 ; 94.488,34.188 94.488,34.519 94.488,34.849 ; 94.971,54.576 94.971,46.253 95.148,46.076 ; 95.148,46.076 95.225,46.152 95.225,44.729 ; 95.225,39.649 95.555,39.98 ; 95.555,39.98 95.555,41.402 ; 95.555,39.98 95.783,40.208 95.783,41.173 95.555,41.402 ; 95.758,50.495 95.327,50.926 95.327,54.576 96.266,54.576 ; 95.758,50.495 96.368,49.886 ; 95.86,63.069 cw(c95.86,62.151) 96.509,62.8 ccw(c95.86,62.151) 95.86,63.069 ; 95.86,63.069 cw(c95.86,62.212) 96.465,62.818 ccw(c95.86,62.212) 95.86,63.069 ; 96.266,54.576 96.266,50.063 96.368,50.165 96.368,49.886 ; 96.266,54.576 96.266,62.509 96.901,61.874 96.901,50.419 96.368,49.886 ; 96.368,49.886 95.834,49.352 97.307,49.352 97.307,61.976 96.52,62.763 ; 96.674,35.846 ccw(c96.502,36.017) 96.745,36.017 ; 96.674,35.846 ccw(c96.502,36.017) 96.745,36.017 ; 96.674,35.846 ccw(c96.502,36.017) 96.745,36.017 ; 104.496,80.696 104.496,78.991 105.08,79.575 105.08,81.94 106.604,83.464 106.604,85.395 107.798,86.589 110.617,86.589 111.633,85.573 111.633,83.668 112.092,83.208 ; 104.496,80.696 106.235,82.436 ; 104.496,80.696 104.47,80.67 104.47,78.965 104.696,78.74 105.258,78.74 106.832,80.315 118.828,80.315 ; 105.308,79.198 ccw(c105.308,80.181) 106.004,79.486 ; 105.308,79.198 ccw(c105.308,80.181) 106.004,79.486 ; 105.308,79.198 ccw(c105.308,80.181) 106.004,79.486 ; 105.321,79.2 ccw(c105.05,80.211) 105.957,79.688 ; 105.321,79.2 ccw(c105.05,80.211) 105.957,79.688 ; 105.321,79.2 ccw(c105.05,80.211) 105.957,79.688 ; 105.321,79.2 ccw(c105.05,80.211) 105.957,79.688 ; 105.321,79.2 ccw(c105.05,80.211) 105.957,79.688 ; 105.321,79.2 ccw(c105.05,80.211) 105.957,79.688 ; 106.235,82.436 v2@106.87,82.436 ; 106.235,82.436 106.219,82.436 106.121,82.533 106.121,83.083 v2@106.68,82.525 ; 106.235,82.436 106.324,82.525 v2@106.68,82.525 ; v2@106.68,82.525 v2@106.782,82.525 ; v2@106.782,82.525 v2@106.931,82.525 ; v2@106.782,82.525 106.782,84.303 ; 106.782,84.303 107.15,84.671 ; 106.782,84.303 106.782,84.379 107.112,84.709 107.15,84.671 ; v2@106.87,82.436 107.975,82.436 ; v2@106.87,82.436 107.249,82.057 107.927,82.057 107.975,82.105 107.975,82.436 ; v2@106.931,82.525 107.975,82.525 ; v2@106.931,82.525 107.442,83.036 107.442,84.379 107.15,84.671 ; 107.15,84.671 107.975,85.496 ; 107.975,82.436 107.975,82.525 ; 107.975,82.525 108.56,82.525 ; 107.975,82.525 107.975,85.496 ; 107.975,85.496 107.975,86.081 ; 107.975,85.496 v2@108.56,86.081 ; 107.975,86.081 107.95,86.081 106.883,85.014 106.883,85.496 107.975,86.589 107.975,86.081 ; 107.975,86.081 v2@108.56,86.081 ; 108.179,72.517 108.179,73.254 ; 108.56,82.525 v2@108.56,86.081 ; 108.56,82.525 109.466,82.525 ; 109.466,82.525 109.466,81.788 111.992,81.788 112.513,82.309 112.308,82.309 112.092,82.525 ; 109.466,82.525 110.583,82.525 ; 110.583,82.525 110.583,82.488 110.62,82.525 ; 110.583,82.525 110.583,82.561 ; 110.583,82.525 110.62,82.525 ; 110.583,82.561 110.62,82.525 ; 110.62,82.525 112.092,82.525 ; 112.092,82.525 113.342,82.525 ; 112.092,82.525 112.092,83.208 ; 112.092,83.208 112.344,82.956 114.19,82.956 114.605,83.371 116.926,83.371 117.717,84.162 118.162,84.607 119.38,84.607 120.117,83.871 120.701,83.287 ; 112.42,66.269 112.903,66.269 ; 112.42,66.269 112.903,65.786 113.386,65.786 ; 112.903,66.269 118.974,66.269 119.456,65.786 ; 112.903,66.269 113.386,65.786 ; 113.005,64.821 114.351,64.821 ; 113.342,82.525 116.027,82.525 ; 113.386,65.786 114.351,64.821 ; 113.386,65.786 118.694,65.786 ; 114.351,64.821 v2@119.456,64.821 ; 116.027,82.525 119.507,82.525 119.812,82.829 119.812,81.299 118.828,80.315 ; 116.027,82.525 116.789,83.287 117.907,83.287 119.99,83.287 ; 118.694,65.786 119.456,65.786 ; 118.694,65.786 119.456,65.024 ; 118.828,80.315 BT.2@120.297,80.315 ; v2@119.456,64.821 119.659,64.821 ; v2@119.456,64.821 119.456,65.024 ; 119.456,65.024 119.659,64.821 ; 119.456,65.024 119.456,65.786 ; 119.456,65.786 120.599,65.786 121.996,67.183 122.987,67.183 120.625,64.821 119.939,64.821 ; 119.659,64.821 119.939,64.821 ; 119.99,83.287 120.701,83.287 ; BT.2@120.297,80.315 121.488,80.315 121.488,82.499 120.701,83.287
  Bottom Layer w1.2: pad.0@88.028,64.948 88.205,64.77 88.205,63.686 ; 89.484,40.132 91.897,40.132 ; 89.831,63.144 89.84,63.144 94.894,63.144 ; 94.615,37.186 94.615,41.395 ; 94.971,62.407 95.326,62.763 ; 95.152,63.402 94.894,63.144 ; 95.326,63.754 95.326,68.301 96.825,69.799 ; 95.327,62.763 95.708,63.144 ; 95.656,64.033 95.656,66.345 ; 95.656,66.712 95.656,67.632 ; 96.241,63.677 95.708,63.144 ; 96.52,68.123 97.968,69.571 97.968,70.866 ; 97.307,71.166 97.53,70.944 ; 98.867,73.203 98.867,73.584 97.866,72.583 97.866,71.944 97.866,71.28 ; 99.455,72.836 102.173,72.836 ; 99.466,73.152 99.466,73.99 100.576,73.99 97.866,71.28 ; 99.606,72.885 101.483,74.762 ; 101.295,73.711 104.49,73.711 ; 101.987,73.863 102.593,73.256 ; 104.583,72.836 103.745,72.836 103.014,72.836 ; v11@105.054,73.431 102.768,73.431 102.593,73.256 ; v11@105.181,73.863 106.426,73.863 106.959,73.33 ; v11(105.181,74.752) 105.171,74.762 101.483,74.762 ; 105.461,72.822 106.451,72.822 107.163,72.822 ; 105.994,72.365 106.136,72.222 106.136,72.507 ; 107.213,72.085 105.705,72.085 105.156,71.536 108.88,71.536 ; v2@108.179,71.12 v2@108.179,71.145 ; 108.636,72.06 110.414,72.06 110.693,71.78 110.414,71.501 v2(110.236,71.501) 109.195,71.501 108.788,71.501 ; 94.894,63.144 95.708,63.144 ; 97.53,70.944 96.825,70.239 96.825,71.649 CMZ.2@96.53,71.944 96.53,72.298 98.994,74.762 101.483,74.762 ; 97.53,70.944 97.866,71.28 ; 97.53,70.944 97.866,70.608 97.866,71.28 ; 102.173,72.836 103.014,72.836 ; 102.173,72.836 102.593,73.256 ; 102.593,73.256 103.014,72.836
  Bottom Layer w1.5: v11@105.156,74.6 105.181,74.574 105.181,73.863 v11@105.181,72.923
  other v1: 97.384,56.312 81.305,77.546 112.217,85.141 104.246,88.011 127.508,91.313 104.419,91.872 100.94,94.95 111.709,102.184 115.926,105.486 119.024,112.954
  other v2: 110.566,65.532 111.328,66.243 112.446,69.901 109.398,70.993 105.461,71.247 104.445,78.791 104.445,79.985 103.124,80.038 106.197,80.62 110.312,80.797 111.912,80.797 113.512,80.797 115.112,80.797 116.712,80.797 104.445,81.305 101.629,81.356 107.975,82.042 109.575,82.042 111.175,82.042 112.775,82.042 115.975,82.042 106.782,82.474 115.164,83.287 118.389,83.312 108.56,85.979
  other v3: 87.224,34.417 85.954,35.814 87.224,35.814 87.198,37.186 89.611,38.151 85.954,38.608 87.198,40.056 88.417,40.056 86.182,43.028 87.3,43.79 86.157,44.45 88.494,44.475 87.274,45.136 88.443,45.822 87.3,46.457 88.24,49.124 86.106,62.992 94.442,63.398 96.626,64.287 86.157,64.643 95.331,65.303
  other v4: 90.957,38.202
  other v5: 92.151,34.366
  other v6: 93.294,44.069 93.294,45.466 93.294,46.914 93.294,48.412 93.294,49.86
HWKZ: 
HWPOW: C5.2 JX4.1 JX4.2 pad.0@110.95,112.956 pad.0@110.95,116.032 Q3.3 | length 21.1
  Top Layer w0.6: pad.0@110.95,112.956 110.837,113.069 109.478,113.069 109.124,113.423 109.124,115.583 109.478,115.937 110.855,115.937 pad.0@110.95,116.032 ; C5.2@112.878,109.398 111.303,109.398 111.303,106.528 110.896,106.121 110.896,104.597 111.944,103.55 Q3.3@113.614,103.55
  Top Layer w0.7: pad.0@110.95,112.956 111.455,112.451 111.455,110.855 JX4.2@111.323,110.723
  Top Layer w0.8: pad.0@110.95,116.006 v1(110.95,117.373)
  Bottom Layer w0.8: pad.0@110.95,116.006 v1(110.95,117.373)
IRQ: SPI1.1 SPI2.1 U1.11 | length 26.1
  Top Layer w0.254: U1.11@96.952,89.902 96.952,91.923 ; v1(96.952,97.663) 96.749,97.46 96.749,92.126 96.952,91.923 ; 105.537,98.501 105.537,97.155 100.127,91.745 97.13,91.745 96.952,91.923
  Top Layer w0.7: 105.537,98.501 SPI1.1@105.537,100.032
  Bottom Layer w0.254: v1(96.952,97.663) 96.952,98.222 97.6,98.87
  Bottom Layer w0.6: 97.6,98.87 97.6,101.803
L-G: pad.0@101.6,120.36 R1.1 | length 26.1
  Top Layer w0.254: R1.1@89.387,104.656 R1.1@89.5,104.769
  Top Layer w0.8: R1.1@89.3,104.769 v1(89.3,105.704)
  Bottom Layer w0.254: v1(89.3,105.704) 89.3,110.458 90.068,111.227 91.592,111.227 92.278,111.912 92.278,118.593 93.517,119.832 pad.0@101.468,119.832 ; v1@89.3,105.904 v1@89.5,105.704
L-G-D: R1.2 U1.17 | length 16
  Top Layer w0.254: v1(90.348,90.703) 90.348,89.129 90.799,88.677 U1.17@91.775,88.677
  Top Layer w0.8: v1(89.3,102.083) R1.2@89.3,103.069
  Bottom Layer w0.254: v1(89.3,102.083) 89.3,92.589 90.348,91.542 v1(90.348,90.703)
L-R: 
L-R-D: R2.2 R17.2 U1.10 | length 107.4
  Top Layer w0.254: v1(83.414,70.663) 84.125,70.663 85.039,69.748 89.002,69.748 89.814,68.936 90.551,68.936 91.338,69.723 94.183,69.723 95.047,68.859 95.047,67.488 97.612,64.922 v1@97.815,64.922 ; v1(93.777,86.538) 95.377,88.138 96.901,88.138 97.8,89.037 U1.10@97.8,89.902 97.8,90.968 98.044,91.211 100.33,91.211 106.274,97.155 v1(106.274,97.536) ; R17.2@108.798,67.31 v2(109.931,67.31) 110.071,67.45 110.071,67.188 v2@110.033,67.15 ; R17.2@108.9,67.15 R17.2@108.9,67.45 ; R2.2@114.236,119.732 116.619,117.348 118.618,117.348 120.091,115.875 120.091,108.788 117.272,105.969 117.272,103.911 v1@115.697,102.337
  Bottom Layer w0.254: v1@83.388,70.688 83.388,74.69 86.142,77.445 86.589,77.445 88.163,79.019 88.163,80.086 91.161,83.083 91.161,83.922 v1(93.777,86.538) ; v1(97.841,64.948) 98.497,64.291 106.455,64.291 107.874,65.71 107.874,66.37 108.814,67.31 v2@109.957,67.31 ; v1(106.274,97.536) 106.36,97.622 106.674,97.307 107.798,97.307 108.397,97.907 ; 108.397,97.936 111.35,100.889 114.478,100.889 v1(115.722,102.133)
LED-G: 
LED-R: pad.0@106.68,120.36 R2.1 | length 6.7
  Top Layer w0.254: pad.0@106.68,119.832 106.68,119.609 pad.0@106.883,119.609 ; R2.1@112.536,119.507 R2.1@112.536,119.732
  Top Layer w0.3: pad.0@107.106,119.832 108.763,119.832 R2.1@112.451,119.832
  Top Layer w0.5: R2.1@112.451,119.832 112.536,119.747 R2.1@112.536,119.507
  Top Layer w0.6: pad.0@106.883,119.609 pad.0@107.106,119.832
MISO: SPI1.2 SPI2.2 U1.2 | length 33.1
  Top Layer w0.254: v1(98.095,97.663) 97.307,96.876 97.307,92.634 97.684,92.258 99.598,92.258 104.267,96.926 104.267,97.815 ; 100.768,83.877 v1(101.575,84.684)
  Top Layer w0.5: U1.2@99.825,83.877 100.768,83.877
  Top Layer w0.7: 104.267,97.815 SPI1.2@104.267,100.032
  Bottom Layer w0.254: v1(98.095,97.663) 98.095,97.942 98.87,98.718 ; v1(100.305,92.964) 100.051,92.71 100.051,87.859 101.56,86.35 v1@101.56,84.658
  Bottom Layer w0.6: 98.87,98.718 98.87,101.803
MOSI: SPI1.3 SPI2.3 U1.3 | length 29.9
  Top Layer w0.254: v1(95.301,95.783) 95.301,92.964 v1(95.479,92.786) ; v1@97.18,86.766 98.196,85.75 98.196,85.217 98.73,84.684 U1.3@99.825,84.684
  Top Layer w0.7: v1(102.819,97.688) v1@102.997,97.866 ; 102.997,97.993 SPI1.3@102.997,100.032
  Bottom Layer w0.254: v1(95.301,95.783) 95.301,96.215 96.012,96.926 102.057,96.926 v1(102.819,97.688) ; v1(95.479,92.786) 96.901,91.364 96.901,87.046 v1@97.18,86.766 ; 99.009,96.799 99.009,97.79 100.14,98.921
  Bottom Layer w0.6: 100.14,98.921 100.14,101.803
  other v1: 97.18,86.7
NetC4_1: C15.1 MO.2 U2.5 U2.6 | length 110.8
  Top Layer w0.254: 97.206,69.723 97.231,69.698 ; 97.231,70.202 97.231,69.698 ; 97.447,67.958 97.585,67.958 97.828,67.958 97.024,68.762 96.977,68.809 96.977,69.266 97.079,69.367 ; 97.079,69.367 97.231,69.52 97.231,69.647 ; 97.079,69.367 97.561,69.367 97.257,69.672 ; 97.079,69.367 96.952,69.367 97.231,69.647 ; 97.231,69.647 97.257,69.672 ; 97.231,69.647 97.231,69.698 ; 97.231,69.698 97.257,69.672
  Top Layer w0.5: 97.184,69.295 97.561,69.672 97.565,69.676 ; 98.091,70.202 97.024,70.202 ; v2@98.095,67.869 v2@98.146,67.818 ; 98.095,70.206 98.4,70.51 ; 98.095,70.507 98.098,70.51 98.4,70.51 ; 98.095,71.272 97.024,70.202 ; 98.179,68.301 98.4,68.301 98.4,68.69 98.4,70.51 ; v2(98.273,67.92) 97.968,67.818 v2@98.146,67.818 ; v2@98.294,67.67 v2@98.146,67.818 ; v2@98.882,67.158 98.222,67.818 v2@98.146,67.818 ; 99.974,71.323 99.162,70.51 98.4,70.51 ; C15.1@100.65,70.653 99.974,69.977 99.39,69.393 99.39,65.176 99.314,65.176 ; C15.1@100.94,71.245 100.94,65.43 100.584,65.075 99.416,65.075 99.314,65.176 ; 97.024,70.202 97.024,68.762 97.024,68.518 97.585,67.958 97.928,67.615 98.171,67.615 98.882,66.904 98.882,65.608 99.314,65.176 ; 97.739,67.869 97.917,67.869 97.828,67.958 97.739,67.869
  Top Layer w1: 97.561,69.672 97.561,69.367 97.561,68.918 98.095,68.385 ; 97.565,69.676 98.091,70.202 ; 98.098,70.51 98.505,70.917 98.628,70.917 98.984,71.272 98.984,73.863 99.162,74.041 99.974,73.228 ; 98.179,68.301 98.095,68.385 ; 99.103,69.393 98.4,68.69 98.095,68.385 ; 99.974,71.323 99.974,69.977 99.974,68.25 MO.2@100.533,67.691 ; 99.974,71.425 99.974,73.228 ; 99.974,75.082 99.974,73.228 ; 101.346,76.784 100.127,75.565 100.127,73.076 99.974,73.228 ; U2.5@102.489,76.505 U2.5@102.768,76.784 ; U2.5@103.073,76.784 100.025,76.784 99.466,76.225 99.466,74.32 98.095,72.949 98.095,71.272 98.095,70.507 98.095,70.206 98.095,68.385
  Bottom Layer w0.5: v2(98.273,67.92) 98.781,67.412 98.781,66.751 ; v2(99.136,68.834) v2@99.136,69.113 ; 99.293,70.201 99.2,70.294 ; 99.6,69.698 cw(c100.045,69.698) 99.73,70.012 ; v2(99.644,66.091) v2@99.924,65.938 ; v2@99.657,66.027 99.67,66.04 MO.2@99.67,67.081 ; 100,71.068 ccw(c100,71.738) 100.474,71.264 ; 100.041,71.059 ccw(c100.373,71.788) 100.94,71.222 ; 100.051,66.497 100.127,66.573 100.584,66.116 100.584,69.545 99.543,68.504 99.187,68.504 99.187,68.58 v2(100.305,69.698) 100.736,70.129 100.889,70.129 ; 100.076,71.032 cw(c100.426,71.329) 100.101,71.653 ; 100.1,70.968 cw(c100.648,70.968) 100.26,71.355 ; 100.819,69.884 100.889,69.954 100.889,70.129 ; 98.781,66.751 98.781,66.294 99.136,65.938 v2@99.593,65.938 ; 98.781,66.751 97.968,67.564 97.968,67.945 v2@99.136,69.113 ; 98.781,66.751 v2@99.593,65.938 ; v2@99.136,69.113 100.66,70.637 100.94,70.637 ; v2@99.136,69.113 99.136,69.926 ; 99.136,69.926 100.635,71.425 100.482,71.577 99.2,70.294 ; 99.136,69.926 99.136,70.231 ; 99.136,69.926 99.644,69.926 100.94,71.222 ; 99.136,70.231 99.2,70.294 ; 99.136,70.231 99.136,70.688 ; 99.136,70.688 100.101,71.653 ; 99.136,70.688 99.136,70.968 99.822,71.653 100.101,71.653 ; v2@99.593,65.938 v2@99.924,65.938 ; v2@99.924,65.938 100.711,65.938 100.94,66.167 100.94,70.129 ; 100.101,71.653 100.508,71.653 ; 100.508,71.653 100.711,71.653 100.94,71.425 100.94,71.222 ; 100.508,71.653 100.94,71.222 ; 100.889,70.129 100.94,70.129 ; 100.94,70.129 100.94,70.637 ; 100.94,70.637 100.94,71.222
  other v2: 100.635,66.116 99.085,67.132 99.365,70.968
NetC4_2: C15.2 MO.1 U2.7 U2.8 | length 65.1
  Top Layer w0.5: 101.981,73.762 101.981,66.237 ; U2.7@102.654,73.787 102.87,73.787 102.87,72.568 U2.8@103.022,72.568 ; U2.8@103.022,72.695 U2.8@103.022,72.568 ; 103.403,68.224 v2@103.403,70.151 ; 103.403,71.45 105.232,69.621 105.232,65.761 104.572,65.1 102.387,65.1 101.981,65.507 101.981,66.237 ; 103.403,71.501 103.022,71.882 U2.8@103.022,72.568 ; 104.305,65.354 102.743,65.354 101.981,66.116 101.981,66.237 ; v2@104.318,69.621 104.318,69.875 v2@103.48,70.714 ; U2.8@103.022,72.568 103.403,72.568 103.403,70.79 ; v2@103.403,70.151 103.403,70.714 ; v2@103.403,70.151 104.01,69.545 104.8,69.545 103.632,70.714 v2@103.48,70.714 ; v2@103.403,70.151 102.755,70.8 103.393,70.8 103.403,70.79 ; 103.403,70.714 v2@103.48,70.714 ; 103.403,70.714 103.403,70.79 ; 103.403,70.79 v2@103.48,70.714
  Bottom Layer w0.5: 102.083,70.671 cw(c102.938,70.671) 102.333,71.276 ; MO.1@102.616,68.17 v2@102.616,69.571 ; 102.715,70.981 cw(c103.327,70.91) 103.327,71.526 ; v2@102.863,69.869 102.863,67.843 v2@104.616,69.596 ; 105.105,69.748 105.334,69.52 105.334,66.243 105.034,65.944 102.484,65.944 102.083,66.345 102.083,71.526 103.327,71.526 ; 103.327,71.526 105.258,69.596 v2@104.616,69.596 ; 103.937,69.698 104.038,69.596 v2@104.616,69.596 ; 103.937,69.698 103.708,69.926 103.708,70.028 103.632,69.952 103.632,69.494 103.759,69.367 103.937,69.545 103.937,69.698 ; 103.937,69.698 v2@103.937,70.275 ; v2@103.937,70.275 v2@104.616,69.596 ; v2@103.937,70.275 103.48,70.732 103.625,70.732 103.937,70.421 v2@103.937,70.275
  other v2: 102.616,66.116 103.835,66.142 105.08,66.37 104.089,67.285 105.08,67.843 104.038,68.605 104.648,69.672 102.565,69.698 103.621,70.416
PB7: C10.1 R11.2 R12.2 U1.5 | length 11.5
  Top Layer w0.254: U1.5@99.825,86.277 104.946,86.277 105.333,86.664 106.85,86.664 R12.2@106.85,86.932
  Top Layer w0.6: C10.1@106.85,84.932 R12.2@106.85,86.932 R11.2@106.85,88.932
PC0: 
Q1-B: Q2.1 R13.1 R21.2 | length 11.5
  Top Layer w0.3: R13.1@106.85,90.9 106.85,91.153 108.55,92.853 R21.2@108.55,93 109.606,94.056 115.062,94.056 115.961,94.955 Q2.1@115.961,95.459
Q1-C: 
Q2-C: 
Q2-E: FMQ.2 pad.0@82.017,92.38 Q1.3 | length 3.1
  Top Layer w0.6: FMQ.2@82.017,92.698 81.819,92.501 82.245,92.075 Q1.3@82.245,89.82
Q3-B: Q3.1 R5.1 R24.2 | length 4.6
  Top Layer w0.3: R5.1@110.3,101.15 110.3,99.207 R24.2@110.307,99.2 ; R5.1@110.363,101.371 110.684,101.05 112.208,101.05 112.217,101.041 Q3.1@112.878,101.041
R7: 
R10: 
R19: DW.2 R19.2 R20.2 U1.9 | length 61.6
  Top Layer w0.4: U1.9@98.6,89.967 v1(101.3,89.967)
  Top Layer w0.7: v1@121.526,86.627 123.45,88.55 ; R19.2@123.266,89.184 123.266,90.875 R20.2@123.45,91.059 ; v1(124.257,68.021) DW.2@126.771,68.021
  Bottom Layer w0.254: v1@123.8,87.986 123.571,87.757 123.571,76.276 123.063,75.768 123.063,73.685 124.181,72.568 124.181,68.101 v1@124.258,68.023
  Bottom Layer w0.3: v1(101.3,89.967) 112.624,89.967 117.831,95.174 121.107,95.174 121.895,94.386 121.895,87.02 v1(121.514,86.639)
  other v1: 123.8,88.163
R21: Q1.1 R10.1 R14.2 | length 4.6
  Top Layer w0.5: R14.2@81.295,84.912 Q1.1@81.295,87.32 ; R10.1@81.421,82.931 R14.2@81.421,85.09
RST: 
RST/BI: C9.2 LX1.1 LX1.2 pad.0@92.65,68.222 R9.1 U1.1 WRC.1 | length 54.9
  Top Layer w0.254: v1@95.549,70.307 95.549,72.994 97.585,75.03 LX1.1@97.585,76.757 ; LX1.2@97.6,77.915 97.845,78.16 97.845,78.21 98.214,78.58 98.214,78.584 99.825,80.194 U1.1@99.825,82.904 ; U1.1@99.977,83.122 U1.1@99.977,83.077 ; U1.1@100.082,82.931 U1.1@100.076,82.925 ; v1@112.878,84.252 v1(112.928,84.252) 112.116,83.439 104.47,83.439 103.505,82.474 100.025,82.474 99.977,82.522 U1.1@99.977,82.904 ; C9.2@123.45,96.3 123.25,96.1 123.25,95.876 R9.1@125.12,94.005 ; U1.1@99.825,82.904 U1.1@99.825,83.077 ; U1.1@99.825,82.904 U1.1@99.977,82.904 ; U1.1@99.825,83.077 100.228,83.077 U1.1@100.076,82.925 ; U1.1@99.825,83.077 U1.1@99.977,83.077 ; U1.1@99.977,82.904 U1.1@99.977,83.077 ; U1.1@99.977,82.904 100.076,82.904 U1.1@100.076,82.925
  Top Layer w0.5: WRC.1@120.2,88.8 120.779,88.8 122.022,90.043 122.022,91.923 122.682,92.583 124.333,92.583 125.15,93.4 125.15,93.976 R9.1@125.12,94.005
  Top Layer w0.7: pad.0@92.75,68.182 pad.0@93.337,68.182
  Bottom Layer w0.254: v1@112.878,84.252 116.561,84.252 120.2,87.891
  Bottom Layer w0.3: pad.0@92.75,68.182 pad.0@92.75,68.849
  Bottom Layer w0.5: pad.0@92.75,68.849 94.209,70.307 v1(95.555,70.307)
  Bottom Layer w0.7: 120.2,87.891 WRC.1@120.2,88.8
  other v9: 91.897,68.326
RT: 
SCK: SPI1.4 SPI2.4 U1.31 | length 29.6
  Top Layer w0.254: U1.31@97.8,81.853 97.8,83.957 v1(97.968,84.125) ; v1(99.187,93.015) 99.187,93.574 99.924,94.31 99.924,96.749 ; v1(99.924,97.612) 99.924,96.749 ; 100.508,96.749 99.924,96.749 ; SPI1.4@101.727,100.032 SPI1.4@101.727,100.406 ; SPI1.4@101.854,100.406 101.854,97.333 101.27,96.749 99.924,96.749
  Top Layer w0.7: SPI1.4@101.727,100.406 SPI1.4@101.759,99.955 ; 101.752,98.679 SPI1.4@101.752,100.21
  Bottom Layer w0.254: v1(97.968,84.125) 98.958,85.115 98.958,92.786 v1(99.187,93.015) ; v1@99.898,97.638 SPI2.4@101.397,99.136
  Bottom Layer w0.7: SPI2.4@101.397,99.136 101.397,101.752